# EAGLE board SysnapseWriless-BOB-v1f (EAGLE 5.10)
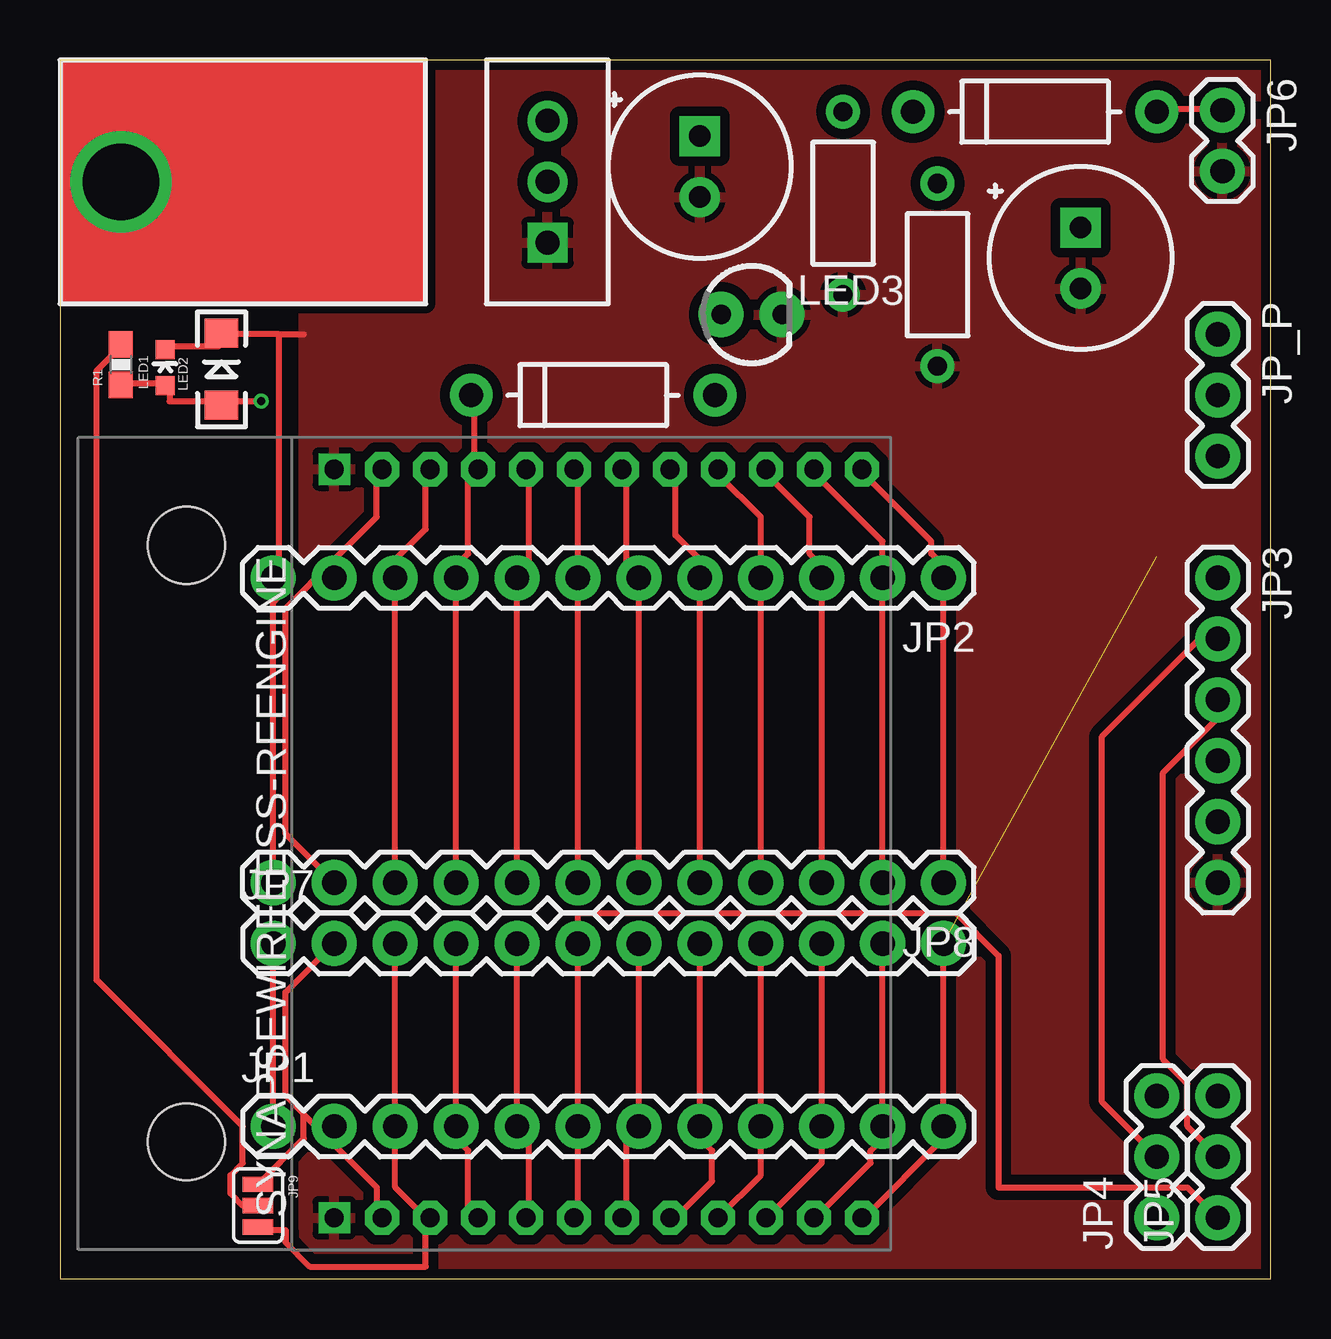
[diagram p0: board, top side]
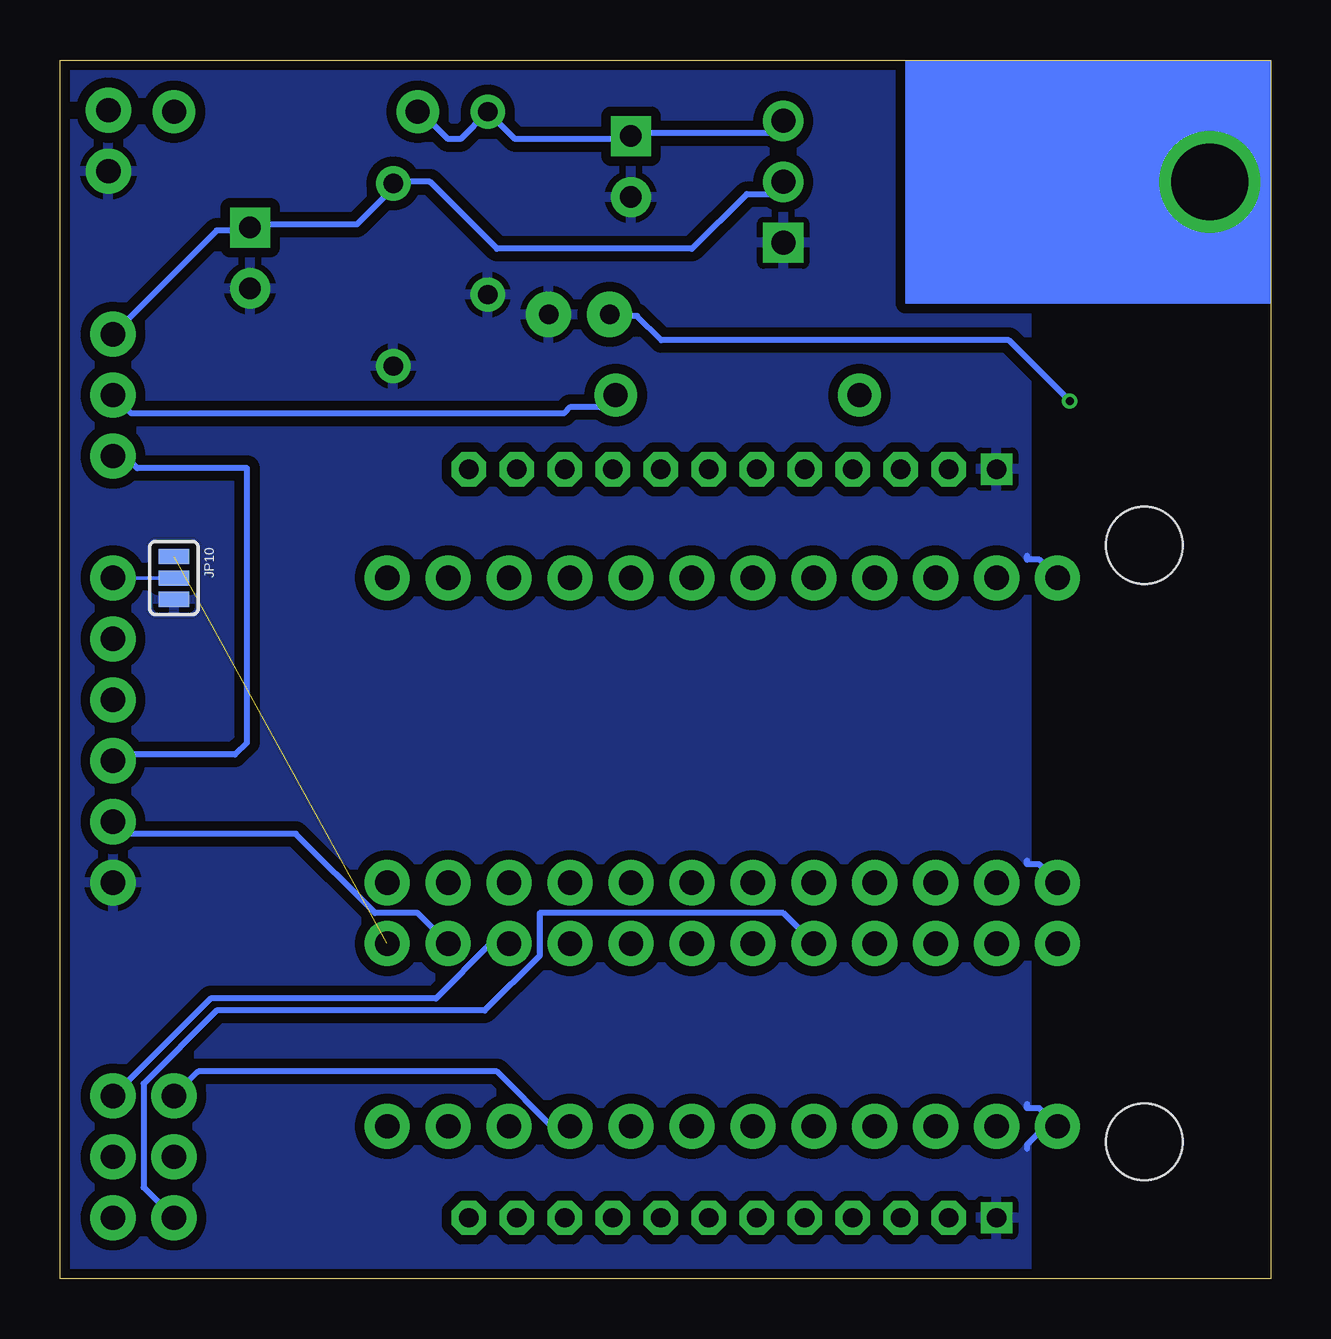
[diagram p1: board, bottom side, seen from below]

Size 50.47 x 50.79 mm. Coordinates in mm from the lower left corner, seen from the top.
Outline: 0,0 50.47,0 50.47,50.79 0,50.79 0,0
Copper layers (1*16): Top 0.035mm / dielectric 1.5mm / Bottom 0.035mm
Design rules "Fusion_eagle_rule_v1.1": minimum track width 6mil, minimum drill 12mil, track to track 6mil, track to pad 6mil, pad to pad 6mil, via to via 6mil, smd to smd 0mil, copper to edge 10mil, drill to drill 10mil, minimum pad ring 10mil, minimum via ring 6mil, stop-mask expansion 2mil, vias tented up to drill 100mil, thermal gap 10mil

## Footprints (pad centres in the part's own frame; a part is rotated, then mirrored left to right if it is on the bottom)
OCTOMINI_CAPDIELEC = drill 0.9 pad 1.676 square: 1 0,0 | drill 0.9 pad 1.676 round: 2 0,-2.54
OCTOMINI_CAPCERAM = drill 0.8 pad 1.422 round: 1 0,0; 2 7.62,0
OCTOMINI_DIODE = drill 1 pad 1.778 round: 1 10.16,0; 2 0,0
1X12 = drill 1.016 pad 1.88 round: 1 0,0; 2 2.54,0; 3 5.08,0; 4 7.62,0; 5 10.16,0; 6 12.7,0; 7 15.24,0; 8 17.78,0; 9 20.32,0; 10 22.86,0; 11 25.4,0; 12 27.94,0
1X06 = drill 1.016 pad 1.88 round: 1 0,0; 2 2.54,0; 3 5.08,0; 4 7.62,0; 5 10.16,0; 6 12.7,0
1X03 = drill 1.016 pad 1.88 round: 1 0,0; 2 2.54,0; 3 5.08,0
1X02 = drill 1.016 pad 1.88 round: 1 0,0; 2 2.54,0
SJ_3 = smd 0.635 x 1.27: 1 -0.889,0; 2 0,0; 3 0.889,0
LED-0603 = smd 0.8 x 0.8: A 0,-0.75; C 0,0.75
LED-1206 = smd 1.2 x 1.4: A -1.5,0; C 1.5,0
LED3MM = drill 0.813 pad 1.88 round: A -1.27,0; K 1.27,0
0603-RES = smd 1.1 x 1: 1 -0.85,0; 2 0.85,0
SYNAPSERF100 = drill 0.8 square: 1 0,0; 24 31.2,0 | drill 0.8 pad 1.422 octagon: 2 0,-2; 3 0,-4; 4 0,-6; 5 0,-8; 6 0,-10; 7 0,-12; 8 0,-14; 9 0,-16; 10 0,-18; 11 0,-20; 12 0,-22; 13 31.2,-22; 14 31.2,-20; 15 31.2,-18; 16 31.2,-16; 17 31.2,-14; 18 31.2,-12; 19 31.2,-10; 20 31.2,-8; 21 31.2,-6; 22 31.2,-4; 23 31.2,-2 | hole 3.2: 3.17,6.16; 28.03,6.16
OCTOMINI_MC33269T-0.5G = drill 1 pad 1.676 square: 1 0,0 | drill 1 pad 1.676 round: 2 2.54,0; 3 5.08,0 | drill 3.2 pad 3.81 round: P$1 2.54,17.78

## Placement (x,y rotation side)
C1  100uf  [OCTOMINI_CAPDIELEC]  26.67,47.62 0 top
C2  100nf  [OCTOMINI_CAPCERAM]  32.64,48.64 270 top
C3  100uf  [OCTOMINI_CAPDIELEC]  42.55,43.81 0 top
C4  100nf  [OCTOMINI_CAPCERAM]  36.58,45.66 270 top
D1  D1  [OCTOMINI_DIODE]  17.14,36.83 0 top
D2  OCTOMINI_DIODE  [OCTOMINI_DIODE]  35.56,48.64 0 top
JP1  M12PTH  [1X12]  8.89,6.35 0 top
JP2  M12PTH  [1X12]  36.83,29.21 180 top
JP3  [1X06]  48.26,29.21 270 top
JP4  JUMPER-3PTH  [1X03]  45.72,2.54 90 top
JP5  JUMPER-3PTH  [1X03]  48.26,2.54 90 top
JP6  [1X02]  48.45,48.7 270 top
JP7  M12PTH  [1X12]  8.89,13.97 0 top
JP8  M12PTH  [1X12]  36.83,16.51 180 top
JP9  JUMPER-3SMD  [SJ_3]  8.26,3.05 270 top
JP10  JUMPER-3SMD  [SJ_3]  45.72,29.21 270 bottom
JP_P  JUMPER-3PTH  [1X03]  48.26,39.37 270 top
LED1  [LED-0603]  4.38,37.97 0 top
LED2  [LED-1206]  6.73,37.91 90 top
LED3  [LED3MM]  28.83,40.2 0 top
R1  [0603-RES]  2.54,38.1 90 top
SYNAPSEWIRELESS-RFENGINE  SYNAPSEWIRELESS-RFENGINESTD  [SYNAPSERF100]  11.43,2.54 90 top
U$1  OCTOMINI_MC33269  [OCTOMINI_MC33269T-0.5G]  20.32,43.18 90 top

## Library data of the parts
C1-C4 D1 D2 U$1 = Amani_64_1d0
JP1-JP10 JP_P LED1-LED3 R1 = SparkFun
SYNAPSEWIRELESS-RFENGINE = 0_jc-custom

## Nets
GND: C1.2 C2.2 C3.2 C4.2 JP1.1 JP2.12 JP3.6 JP6.2 JP7.1 JP8.12 JP10.3 LED1.C LED2.C LED3.K SYNAPSEWIRELESS-RFENGINE.1 SYNAPSEWIRELESS-RFENGINE.24 U$1.1
GPIO0: JP1.2 JP7.2 JP9.1 SYNAPSEWIRELESS-RFENGINE.2
GPIO1: JP1.3 JP7.3 JP9.3 SYNAPSEWIRELESS-RFENGINE.3
GPIO2: JP1.4 JP7.4 SYNAPSEWIRELESS-RFENGINE.4
GPIO3: JP1.5 JP4.1 JP7.5 SYNAPSEWIRELESS-RFENGINE.5
GPIO4: JP1.6 JP5.1 JP7.6 SYNAPSEWIRELESS-RFENGINE.6
GPIO5: JP1.7 JP7.7 SYNAPSEWIRELESS-RFENGINE.7
GPIO6: JP1.8 JP7.8 SYNAPSEWIRELESS-RFENGINE.8
GPIO7: JP1.9 JP4.3 JP7.9 SYNAPSEWIRELESS-RFENGINE.9
GPIO8: JP1.10 JP5.3 JP7.10 SYNAPSEWIRELESS-RFENGINE.10
GPIO9: JP1.11 JP3.5 JP7.11 SYNAPSEWIRELESS-RFENGINE.11
GPIO10: JP1.12 JP7.12 JP10.1 SYNAPSEWIRELESS-RFENGINE.12
GPIO11: JP2.1 JP8.1 SYNAPSEWIRELESS-RFENGINE.13
GPIO12: JP2.2 JP8.2 SYNAPSEWIRELESS-RFENGINE.14
GPIO13: JP2.3 JP8.3 SYNAPSEWIRELESS-RFENGINE.15
GPIO14: JP2.4 JP8.4 SYNAPSEWIRELESS-RFENGINE.16
GPIO15: JP2.5 JP8.5 SYNAPSEWIRELESS-RFENGINE.17
GPIO16: JP2.6 JP8.6 SYNAPSEWIRELESS-RFENGINE.18
GPIO17: JP2.7 JP8.7 SYNAPSEWIRELESS-RFENGINE.19
GPIO18: JP2.8 JP8.8 SYNAPSEWIRELESS-RFENGINE.20
N$1: LED1.A LED2.A LED3.A R1.1
N$2: JP9.2 R1.2
N$3: JP2.10 JP8.10 SYNAPSEWIRELESS-RFENGINE.22
N$7: JP3.1 JP10.2
RESET_L: JP2.11 JP8.11 SYNAPSEWIRELESS-RFENGINE.23
RXI: JP3.2 JP4.2
TXO: JP3.3 JP5.2
VCC: D1.2 JP2.9 JP8.9 SYNAPSEWIRELESS-RFENGINE.21
VCC_FTDI: JP3.4 JP_P.3
VCC_PRE: D1.1 JP_P.2
VCC_REG: C3.1 C4.1 JP_P.1 U$1.2
VIN: D2.1 JP6.1
VIN_F: C1.1 C2.1 D2.2 U$1.3

## Tracks (layer width: path | path; a pad name or v marks a point on that pad's centre or on a via)
GND
  Top 0.254: JP1.1 JP7.1 | LED1.C 4.57,38.86 6.6,38.86 6.6,39.37 LED2.C 6.86,39.37 9.14,39.37 | 9.14,39.37 10.16,39.37 | 9.14,39.37 9.14,28.45 8.89,28.19 JP8.12
  Bottom 0.254: 9.14,6.6 9.65,7.11 10.16,7.11 10.16,7.27 | JP8.12 9.65,17.27 10.16,17.27 10.16,17.43 | JP2.12 9.65,29.97 10.16,29.97 10.16,30.13 | 9.14,6.6 10.16,5.59 10.16,5.43 | JP1.1 9.14,6.6
  pour Bottom (isolate 0.406): 10.16,50.8 50.8,50.8 50.8,0 10.16,0
  pour Top (isolate 0.406): 10.16,50.8 50.8,50.8 50.8,0 10.16,0
GPIO0
  Top 0.254: 11.43,5.59 13.21,3.81 13.21,2.54 SYNAPSEWIRELESS-RFENGINE.2 | JP7.2 9.4,11.94 9.4,7.62 10.16,6.86 | 10.16,6.86 11.43,5.59 | 11.43,5.59 JP1.2 | 10.16,6.86 10.16,5.84 JP9.1
GPIO1
  Top 0.254: 15.24,2.54 13.97,3.81 JP1.3 JP7.3 | 15.24,2.54 15.24,0.51 10.41,0.51 9.4,1.52 9.4,2.03 8.38,2.03 JP9.3 | 15.24,2.54 SYNAPSEWIRELESS-RFENGINE.3
GPIO2
  Top 0.254: SYNAPSEWIRELESS-RFENGINE.4 17.27,2.54 17.02,2.79 17.02,5.33 16.51,5.84 JP1.4 JP7.4
GPIO3
  Top 0.254: SYNAPSEWIRELESS-RFENGINE.5 19.56,2.54 19.56,6.35 JP1.5 JP7.5
  Bottom 0.254: JP4.1 46.99,3.81 46.99,8.13 43.94,11.18 32.77,11.18 30.48,13.46 30.48,15.24 20.32,15.24 JP7.5
GPIO4
  Top 0.254: SYNAPSEWIRELESS-RFENGINE.6 21.59,2.54 JP1.6 JP7.6 21.59,15.24 37.34,15.24 39.12,13.46 39.12,3.81 46.99,3.81 JP5.1
GPIO5
  Top 0.254: SYNAPSEWIRELESS-RFENGINE.7 23.62,2.54 23.62,6.35 JP1.7 JP7.7
GPIO6
  Top 0.254: SYNAPSEWIRELESS-RFENGINE.8 25.65,2.54 27.18,4.06 27.18,5.33 26.67,5.84 JP1.8 JP7.8
GPIO7
  Top 0.254: SYNAPSEWIRELESS-RFENGINE.9 29.21,4.32 JP1.9 JP7.9
  Bottom 0.254: JP4.3 44.7,8.64 32.26,8.64 29.97,6.35 JP1.9
GPIO8
  Top 0.254: SYNAPSEWIRELESS-RFENGINE.10 29.46,2.54 31.75,4.83 JP1.10 JP7.10
  Bottom 0.254: JP5.3 44.2,11.68 34.8,11.68 32.51,13.97 JP7.10
GPIO9
  Top 0.254: SYNAPSEWIRELESS-RFENGINE.11 31.5,2.54 33.78,4.83 33.78,5.33 34.29,5.84 JP1.11 JP7.11
  Bottom 0.254: JP3.5 47.75,18.54 40.64,18.54 37.34,15.24 35.56,15.24 JP7.11
GPIO10  (1 unrouted)
  Top 0.254: SYNAPSEWIRELESS-RFENGINE.12 33.53,2.54 36.83,5.84 JP1.12 JP7.12
GPIO11
  Top 0.254: SYNAPSEWIRELESS-RFENGINE.13 33.53,33.53 36.32,30.73 36.32,30.23 36.83,29.72 JP2.1 JP8.1
GPIO12
  Top 0.254: SYNAPSEWIRELESS-RFENGINE.14 31.5,33.53 34.29,30.73 JP2.2 JP8.2
GPIO13
  Top 0.254: SYNAPSEWIRELESS-RFENGINE.15 29.46,33.53 31.24,31.75 31.24,30.23 31.75,29.72 JP2.3 JP8.3
GPIO14
  Top 0.254: SYNAPSEWIRELESS-RFENGINE.16 27.43,33.53 29.21,31.75 JP2.4 JP8.4
GPIO15
  Top 0.254: SYNAPSEWIRELESS-RFENGINE.17 25.65,33.53 25.65,30.99 26.67,29.97 JP2.5 JP8.5
GPIO16
  Top 0.254: SYNAPSEWIRELESS-RFENGINE.18 23.62,33.53 23.62,29.21 JP2.6 JP8.6
GPIO17
  Top 0.254: SYNAPSEWIRELESS-RFENGINE.19 21.59,33.53 JP2.7 JP8.7
GPIO18
  Top 0.254: SYNAPSEWIRELESS-RFENGINE.20 19.56,33.53 19.56,29.21 JP2.8 JP8.8
N$1  (via drill 0.33)
  Top 0.254: R1.1 2.54,37.34 4.32,37.34 LED1.A 4.57,37.08 4.57,36.58 6.6,36.58 LED2.A 6.86,36.58 v8.38,36.58
  Bottom 0.254: v8.38,36.58 10.92,39.12 25.4,39.12 26.42,40.13 27.43,40.13 LED3.A
N$2
  Top 0.254: R1.2 2.54,38.86 1.52,37.85 1.52,12.45 7.62,6.35 7.62,4.83 7.11,4.32 7.11,3.56 7.62,3.05 JP9.2
N$3
  Top 0.254: SYNAPSEWIRELESS-RFENGINE.22 15.24,33.53 15.24,31.24 13.97,29.97 JP2.10 JP8.10
N$7
  Bottom 0.152: JP10.2 JP3.1
RESET_L
  Top 0.254: 11.43,29.97 13.21,31.75 13.21,33.53 SYNAPSEWIRELESS-RFENGINE.23 | JP8.11 9.4,18.54 9.4,27.94 11.43,29.97 | 11.43,29.97 JP2.11
RXI
  Top 0.254: JP4.2 43.43,7.37 43.43,22.61 47.5,26.67 JP3.2
TXO
  Top 0.254: JP5.2 46.99,6.35 46.99,8.13 45.97,9.14 45.97,21.08 48.26,23.37 JP3.3
VCC
  Top 0.254: D1.2 17.27,36.83 17.27,33.78 SYNAPSEWIRELESS-RFENGINE.21 17.27,33.53 17.02,33.27 17.02,30.23 16.51,29.72 JP2.9 JP8.9
VCC_FTDI
  Bottom 0.254: JP3.4 48.01,21.84 43.18,21.84 42.67,22.35 42.67,33.78 47.24,33.78 47.75,34.29 JP_P.3
VCC_PRE
  Bottom 0.254: JP_P.2 47.5,36.07 29.46,36.07 29.21,36.32 27.94,36.32 27.43,36.83 D1.1
VCC_REG
  Bottom 0.254: U$1.2 20.83,45.21 21.84,45.21 24.13,42.93 32.26,42.93 35.05,45.72 36.58,45.72 C4.1 36.58,45.47 38.1,43.94 42.42,43.94 C3.1 42.67,43.69 43.94,43.69 JP_P.1
VIN
  Top 0.254: D2.1 45.72,48.77 48.26,48.77 JP6.1
VIN_F
  Bottom 0.254: D2.2 35.56,48.51 35.31,48.51 34.29,47.5 33.78,47.5 C2.1 31.5,47.5 26.67,47.5 C1.1 26.67,47.75 20.83,47.75 U$1.3

## Text on the board
tDocu: + | D2 | C1 | C2 | C3 | C4 | VREG | VCC | D1 | FTDI | RXI | TXO | VCC | CTS | GND | Synapse-BOB Rev1f | RX | TX | 1 | UART | 0
bDocu: 20100928 | 2.7-3.4 | GND | RESET_L | PTG0/BKDG | VCC | GPIO18_AD0 | GPIO17_AD1 | GPIO16_AD2 | GPIO15_AD3 | AD4 | GPIO13_AD5 | GPIO12_AD6 | GPIO11_AD7 | GND | GPIO0 | GPIO1 | GPIO2 | RX0 | TX0 | 5_CTS0 | 6_RTS0 | 7_RX1 | 8_TX1 | 9_CTS1 | 10_RTS1 | J.C. Woltz